# Altium PCB 1.8寸脱机4轴.PcbDoc
Units mm, origin at the board's own origin, x right, y up, seen from the top; angles counter-clockwise.
Board outline 222.2 x 126.2 mm, 2 copper layers (Top Layer, Bottom Layer); 53 components, 62 nets, 302 pads, 159 vias.
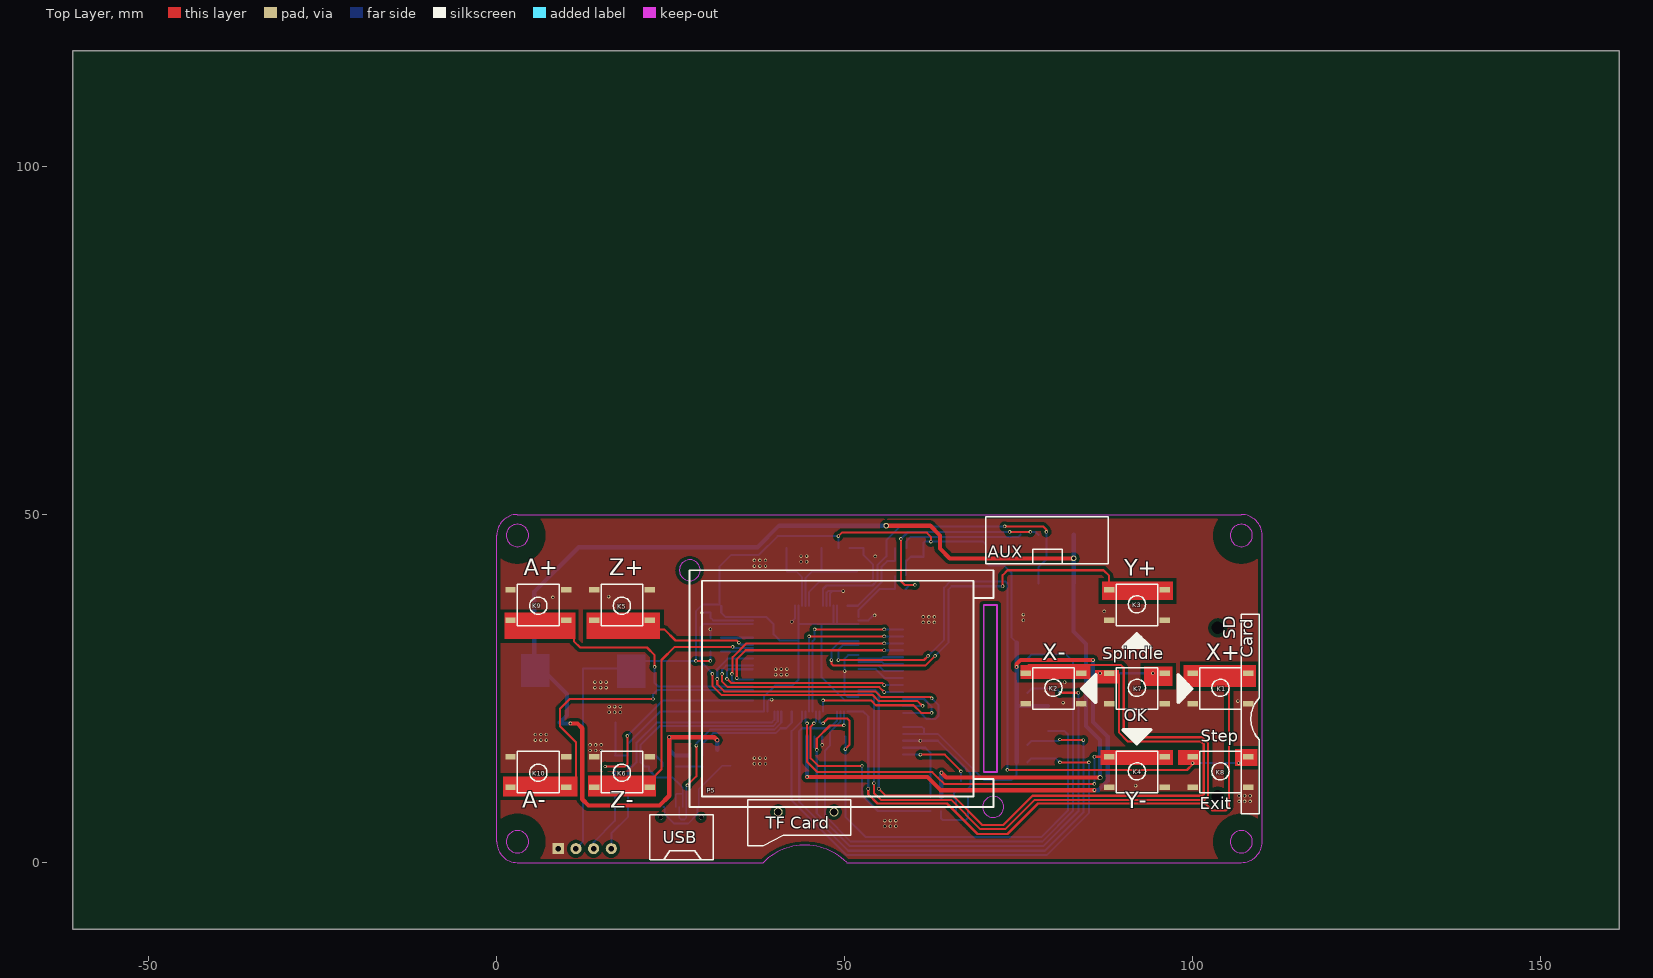
[diagram p0: Top Layer view]
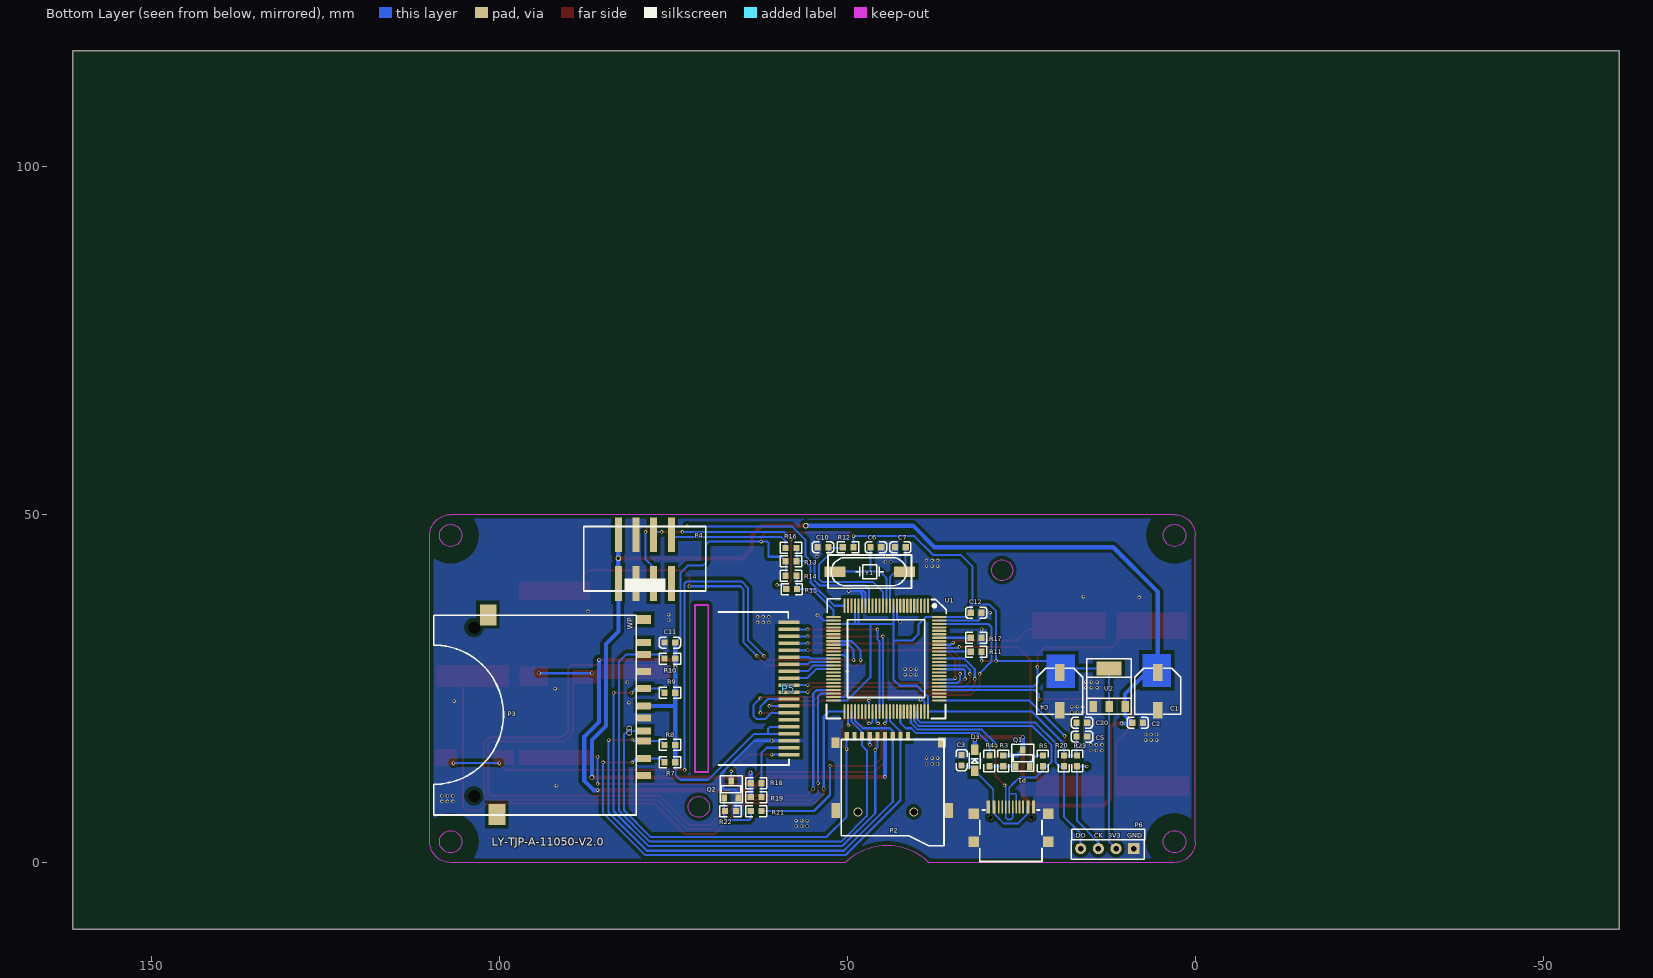
[diagram p1: Bottom Layer view, seen from below]

## Layer stack, top to bottom
Top Solder: solder mask 0.0102, Solder Resist, Dk 3.5
Top Layer: signal copper 0.0356
Dielectric1: dielectric 0.32, FR-4, Dk 4.8
Bottom Layer: signal copper 0.0356
Bottom Solder: solder mask 0.0102, Solder Resist, Dk 3.5

## Board outline
-60.9,-9.56 -60.9,116.64 161.3,116.64 161.3,-9.56 -60.9,-9.56

## Design rules (kind name [scope] priority, off if disabled: settings)
Clearance [All] p1: gap=0.178
ComponentClearance [All] p1 off: gap=0.254 collisioncheckmode=3 verticalgap=0.254 showdistances=FALSE
MinimumSolderMaskSliver [All] p1 off: minsoldermaskwidth=0.254
PolygonConnect [All] p1: connectstyle=Direct reliefconductorwidth=0.254 reliefentries=4 polygonreliefangle="90 Angle" airgapwidth=0.254
RoutingVias [All] p1: holewidth=0.3 width=0.5 viastyle="Through Hole" minholewidth=0.3 minwidth=0.3 maxholewidth=5 maxwidth=7
SilkToSilkClearance [All] p1 off: silktosilkclearance=0.254
SilkToSolderMaskClearance SilkscreenOverComponentPads [IsPad] p1 off: minsilkscreentomaskgap=0.254 clearancetoexposedcopper=TRUE
SolderMaskExpansion [All] p1: expansion=0.102
Width [All] p1: maxlimit=5 minlimit=0.1 preferedwidth=0.254
26 further rules are at their usual default settings.

## Components (designator, comment, footprint, x,y, rotation, side; value= is the part's Value field where it differs from the comment)
C1 "100uF/35V" 电解电容贴片6X6 5.4,24.6 r270 bottom
C2 "104" 0603C 8.3,20.1 r0 bottom
C3 "104" 0603C 33.6,14.7 r270 bottom
C4 "100uF/35V" 电解电容贴片6X6 19.5,24.6 r270 bottom
C5 "104" 0603C 16.3,18.1 r0 bottom
C6 "22pF" 0603C 45.9,45.3 r180 bottom
C7 "22pF" 0603C 42.4,45.3 r0 bottom
C10 "104" 0603C 53.5,45.3 r180 bottom
C11 "104" 0603C 75.5,31.6 r180 bottom
C12 "104" 0603C 31.5,35.9 r0 bottom
C20 "106" 0603C 16.3,20.1 r0 bottom
D3 "S4" SOD-123 31.7,14.7 r90 bottom
K1 "" 按键6X6贴片 104,25 r90 top locked
K2 "" 按键6X6贴片 80,25 r90 top locked
K3 "" 按键6X6贴片 92,37 r90 top locked
K4 "" 按键6X6贴片 92,13 r90 top locked
K5 "" 按键6X6贴片 18,37 r270 top locked
K6 "" 按键6X6贴片 18,13 r270 top locked
K7 "" 按键6X6贴片 92,25 r90 top locked
K8 "" 按键6X6贴片 104,13 r90 top locked
K9 "" 按键6x6贴片 6,37 r270 top
K10 "" 按键6x6贴片 6,13 r270 top
P1 "USB座TYPE-C-16P" USB-TYPE-C-16P-全贴片 26.5,5.3 r180 bottom
P2 "TF" TF卡自弹式 43.7,10.3 r0 bottom
P3 "11P" SD卡座自弹式 91.421,21.244 r90 bottom
P4 "8P" IDC8贴片 79.1,43.6 r180 bottom
P5 "LCD" 显示屏1.77寸 48,25 r90 top
P6 "" SIP4 8.86,2 r0 bottom
Q1 "SS8550" SOT-23 24.8,15 r180 bottom
Q2 "S8050" SOT-23 66.7,10.5 r180 bottom
R3 "10K" 0603R 27.6,14.6 r270 bottom
R4 "1K" 0603R 29.6,14.6 r90 bottom
R5 "1K" 0603R 21.9,14.6 r270 bottom
R7 "10K" 0603R 75.5,14.4 r0 bottom
R8 "10K" 0603R 75.5,16.9 r0 bottom
R9 "10K" 0603R 75.5,24.4 r0 bottom
R10 "10K" 0603R 75.5,29.3 r0 bottom
R11 "10K" 0603R 31.5,30.3 r0 bottom
R12 "10k" 0603R 49.9,45.3 r0 bottom
R13 "10K" 0603R 58.1,43.3 r0 bottom
R14 "10K" 0603R 58.1,41.2 r0 bottom
R15 "47" 0603R 58,39.3 r0 bottom
R16 "47" 0603R 58.1,45.2 r0 bottom
R17 "10k" 0603R 31.5,32.3 r0 bottom
R18 "47" 0603R 63.1,11.4 r0 bottom
R19 "47" 0603R 63.1,9.4 r0 bottom
R20 "10k" 0603R 18.9,14.6 r90 bottom
R21 "1K" 0603R 63.1,7.4 r180 bottom
R22 "10K" 0603R 66.8,7.4 r0 bottom
R23 "10k" 0603R 17,14.6 r90 bottom
U1 "STM32F103VCT6" LQFP100 44.4,29.3 r270 bottom
U2 "1117-3.3" SOT-223 12.4,25.1 r180 bottom
Y1 "8M" 晶振贴片 46.8,41.8 r0 bottom

## Footprints (in the part's own frame and the unit in brackets; to place one, negate y for a bottom-side part, rotate by r counter-clockwise, add the part's x,y. Pads: shape width x height; smd on the part's side, far side on the other; paste and mask are expansions set on the pad)
0603C [mil]
  rect 35x35 smd: 1(-30.5,0) 2(30.5,0)
  silkscreen extent -61,-31 60,31
0603R [mil]
  rect 35x35 smd: 1(-30.5,0) 2(30.5,0)
  silkscreen extent -61,-31 60,31
IDC8贴片 [mm]
  rect 1x5 smd: 1(-3.81,-3.5) 2(-3.81,3.5) 3(-1.27,-3.5) 4(-1.27,3.5) 5(1.27,-3.5) 6(1.27,3.5) 7(3.81,-3.5) 8(3.81,3.5)
  silkscreen extent -8.76,-4.7 8.76,4.7
LQFP100 [mm]
  oval 2.1x0.3 smd: 1(-7.6,6) 2(-7.6,5.5) 3(-7.6,5) 4(-7.6,4.5) 5(-7.6,4) 6(-7.6,3.5) 7(-7.6,3) 8(-7.6,2.5) 9(-7.6,2) 10(-7.6,1.5) 11(-7.6,1) 12(-7.6,0.5) 13(-7.6,0) 14(-7.6,-0.5) 15(-7.6,-1) 16(-7.6,-1.5) 17(-7.6,-2) 18(-7.6,-2.5) 19(-7.6,-3) 20(-7.6,-3.5) 21(-7.6,-4) 22(-7.6,-4.5) 23(-7.6,-5) 24(-7.6,-5.5) 25(-7.6,-6) 51(7.6,-6) 52(7.6,-5.5) 53(7.6,-5) 54(7.6,-4.5) 55(7.6,-4) 56(7.6,-3.5) 57(7.6,-3) 58(7.6,-2.5) 59(7.6,-2) 60(7.6,-1.5) 61(7.6,-1) 62(7.6,-0.5) 63(7.6,0) 64(7.6,0.5) 65(7.6,1) 66(7.6,1.5) 67(7.6,2) 68(7.6,2.5) 69(7.6,3) 70(7.6,3.5) 71(7.6,4) 72(7.6,4.5) 73(7.6,5) 74(7.6,5.5) 75(7.6,6)
  oval 0.3x2.1 smd: 26(-6,-7.6) 27(-5.5,-7.6) 28(-5,-7.6) 29(-4.5,-7.6) 30(-4,-7.6) 31(-3.5,-7.6) 32(-3,-7.6) 33(-2.5,-7.6) 34(-2,-7.6) 35(-1.5,-7.6) 36(-1,-7.6) 37(-0.5,-7.6) 38(0,-7.6) 39(0.5,-7.6) 40(1,-7.6) 41(1.5,-7.6) 42(2,-7.6) 43(2.5,-7.6) 44(3,-7.6) 45(3.5,-7.6) 46(4,-7.6) 47(4.5,-7.6) 48(5,-7.6) 49(5.5,-7.6) 50(6,-7.6) 76(6,7.6) 77(5.5,7.6) 78(5,7.6) 79(4.5,7.6) 80(4,7.6) 81(3.5,7.6) 82(3,7.6) 83(2.5,7.6) 84(2,7.6) 85(1.5,7.6) 86(1,7.6) 87(0.5,7.6) 88(0,7.6) 89(-0.5,7.6) 90(-1,7.6) 91(-1.5,7.6) 92(-2,7.6) 93(-2.5,7.6) 94(-3,7.6) 95(-3.5,7.6) 96(-4,7.6) 97(-4.5,7.6) 98(-5,7.6) 99(-5.5,7.6) 100(-6,7.6)
  silkscreen extent -8.6,-8.6 8.6,8.6
SD卡座自弹式 [mm]
  round 1.524 hole 1.8: 0(-11.684,12.221) 0(12.499,12.221)
  rect 1x2 smd: 1(-6.264,-12.221) 2(-3.764,-12.221) 3(-0.464,-12.221) 4(1.236,-12.221) 5(3.736,-12.221) 6(6.236,-12.221) 7(8.666,-12.221) 8(10.356,-12.221) 9(-8.764,-12.221) 10(-2.364,-12.221)
  rect 1.3x2 smd: 11(13.656,-12.221)
  rect 3x2.4 smd: 12(14.351,10.189) 13(-14.351,8.919)
  silkscreen extent -14.41,-11.08 14.29,18
SIP4 [mm] "Connector; Header; 4 Position"
  rect 1.6x1.6 hole 0.8: 1(0,0)
  round 1.6 hole 0.8: 2(2.54,0) 3(5.08,0) 4(7.62,0)
  silkscreen extent -1.52,-1.27 9,1.52
SOD-123 [mm]
  rect 1.5x1.1 smd: 1(-1.5,0) 2(1.5,0)
  silkscreen extent -1.2,-0.8 1.1,0.8
SOT-23 [mm]
  rect 0.8x1 smd: 1(-1,-1.2) 2(0,1.2) 3(1,-1.2)
  silkscreen extent -1.6,-1.9 1.6,2
SOT-223 [mm] "SOT-223/SC-73; 4 Leads; Body 6.7 x 7.3 mm, inc. leads (LxW max)"
  rect 1.1x1.6 smd: 1(-2.3,-2.7) 2(0,-2.7) 3(2.3,-2.7)
  rect 3.6x2 smd: 4(0,2.8)
  silkscreen extent -3.2,-3.8 3.2,4.2
TF卡自弹式 [mil]
  round 50 hole 39.37: 0(-127.73,119.44) 0(188.27,119.44)
  rect 23x47.24 smd: 1(-95.23,-308.56) 2(-51.86,-308.56) 3(-8.48,-308.56) 4(34.89,-308.56) 5(78.27,-308.56) 6(121.64,-308.56) 7(165.02,-308.56) 8(208.39,-308.56) 9(251.77,-308.56)
  rect 46x60 smd: 10(314.27,-272.06)
  rect 46x85 smd: 11(313.77,110.44) 12(-325.23,109.94)
  rect 45x56 smd: 13(-286.23,-274.56)
  silkscreen extent -298,-291 283,310
USB-TYPE-C-16P-全贴片 [mm]
  rect 1.5x1.5 smd: 1(-5.33,1.713) 2(5.33,1.713) 3(-5.33,-2.287) 4(5.33,-2.287)
  rect 0.26x1.9 smd: A1(-3.35,2.693) A4(-2.55,2.693) A5(-1.25,2.693) A6(-0.25,2.693) A7(0.25,2.693) A8(1.25,2.693) A9(2.55,2.693) A12(3.35,2.693) B1(3.15,2.693) B4(2.35,2.693) B5(1.75,2.693) B6(0.75,2.693) B7(-0.75,2.693) B8(-1.75,2.693) B9(-2.35,2.693) B12(-3.15,2.693)
  round 0.65 hole 0.65 unplated: ""(-2.89,1.213) ""(2.89,1.213)
  silkscreen extent -4.47,-5.14 4.47,2.24
按键6X6贴片 [mm]
  rect 0.8x1.5 smd: 1(2.2,4) 2(-2.2,4) 3(2.2,-4) 4(-2.2,-4)
  silkscreen extent -3,-3 3,3
按键6x6贴片 [mm]
  rect 0.8x1.5 smd: 1(2.2,4) 2(-2.2,4) 3(2.2,-4) 4(-2.2,-4)
  silkscreen extent -3,-3 3,3
显示屏1.77寸 [mm]
  rect 0.5x3 smd far side: 1(-9.5,-10.4) 2(-8.5,-10.4) 3(-7.5,-10.4) 4(-6.5,-10.4) 5(-5.5,-10.4) 6(-4.5,-10.4) 7(-3.5,-10.4) 8(-2.5,-10.4) 9(-1.5,-10.4) 10(-0.5,-10.4) 11(0.5,-10.4) 12(1.5,-10.4) 13(2.5,-10.4) 14(3.5,-10.4) 15(4.5,-10.4) 16(5.5,-10.4) 17(6.5,-10.4) 18(7.5,-10.4) 19(8.5,-10.4) 20(9.5,-10.4)
  Keep-Out Layer lines w0.256: -12,-22 12,-22 12,-23.9 -12,-23.9 -12,-22
  silkscreen extent -17,-23.4 17,20.3
晶振贴片 [mm]
  rect 3x1.5 smd: 1(-5,0) 2(5,0)
  silkscreen extent -6,-2.4 6,2.4
电解电容贴片6X6 [mm]
  rect 2.4x1.4 smd: 1(-2.7,0) 2(2.7,0)
  silkscreen extent -3.3,-3.3 3.3,3.3

## Part data
C1 C4: library part ELECTRO1
C2 C3 C5 C6 C7 C10 C20: library part "Cap Semi", "Capacitor (Semiconductor SIM Model)"
C11 C12: library part CAP
D3: library part 1N4148
K1 K2 K3 K4 K5 K6 K7 K8 K9 K10: library part 按键
P2: library part 9P
P5: library part 20P
P6: library part 4P
Q1: library part PNP
Q2: library part NPN
R3 R4 R5 R7 R8 R9 R10 R11 R12 R13 R14 R15 R16 R17 R18 R19 R20 R21 R22 R23: library part RES, "Resistor"
U1: library part STM32F103VBT6, "STM32 ARM-based 32-bit MCU with 64 Kbytes Flash, 100-pin LQFP, Industrial Temperature"
U2: library part LM1117
Y1: library part XTAL, "Crystal Oscillator"

## Free pads (board coordinates)
  round 0.8 hole 0.5: 0(82.9,43.7) 1(55.972,48.4)

## Via types
v1: diameter 0.5, hole 0.3, Top Layer to Bottom Layer, 158 vias
v2: diameter 0.7, hole 0.5, Top Layer to Bottom Layer, 1 vias

## Nets (pads, with @x,y where several pads share a name; then routed paths per layer and width w, separated by ;. In a path a pad name is that pad's centre, name@x,y a point inside that pad or via, vN(x,y) a via of type N, cw(c..) or ccw(c..) an arc to the next point about the centre after c; other vN are vias at no path point)
3V3: C4.1 C5.2 C11.2 C12.2 C20.2 P2.4 P3.4 P5.4 P5.5 P6.2 R7.1 R8.1 R9.1 R10.1 R11.1 R12.1 R13.2 R14.2 R20.2 R23.2 U1.11 U1.21 U1.22 U1.28 U1.50 U1.75 U1.100 U2.2 U2.4 | length 351.6
  Top Layer w0.3: v1(28.625,28.975) v1(30.725,28.975) ; v1(49.1,46.9) 49.6,47.4 61.8,47.4 62.4,46.8 v1(62.4,46.1)
  Top Layer w0.6: v1(44.6,12.3) 46.1,12.3 ; 45.6,12.3 46.1,12.3 ; v1(74.7,28.1) 74.7,28.5 75.3,29.1 v1(85.7,29.1) ; v1(85.9,10.4) 63.8,10.4 61.9,12.3 46.1,12.3
  Bottom Layer w0.3: P6.2 12.4,3 U2.2 U2.4 18.9,27.9 C4.1 21.175,28.975 v1(28.625,28.975) 28.625,36.125 29.6,37.1 32,37.1 ; C20.2 C5.2 17.075,15.449 R23.2 R20.2 18.9,17.1 23.5,21.7 32,21.7 ; v1(30.725,28.975) R11.1 ; 31.5,21.7 32,21.7 ; U1.11 43.4,31.9 ; 43.5,34.3 46.7,34.3 ; U1.21 48.4,34.3 ; U1.22 48.9,34.3 ; R12.1@49.125,45.2 R12.1 49.125,46.875 v1(49.1,46.9) 40.4,46.9 37.7,44.2 33.7,44.2 32,42.5 32,37.1 ; U1.50 50,23.3 46.7,26.6 46.7,34.3 ; U1.28 48.9,34.3 ; P5.4 61.4,18.5 ; P5.5 61.1,19.5 61.4,19.2 61.4,18.5 ; R14.2@58.8,41.3 R13.2@58.8,43.4 ; R13.2 59.51,43.935 61.317,43.935 61.317,45.917 61.5,46.1 v1(62.4,46.1) 69.9,46.1 70.3,45.7 70.3,43.165 70.8,42.665 72.935,42.665 74,41.6 74,32.325 C11.2 ; R7.1 74.725,12.625 74,11.9 70,11.9 63.4,18.5 61.4,18.5 ; 74.725,21.8 74.805,21.88 ; 32,21.7 U1.75 38.4,23.8 40,25.4 42.5,25.4 43.4,26.3 43.4,31.9 ; 32,37.1 32.275,36.825 C12.2 32.875,35.3 U1.100 38.7,35.3 39.8,34.2 39.8,32.8 40.7,31.9 43.4,31.9 ; 46.7,34.3 48.4,34.3 ; 48.4,34.3 48.9,34.3
  Bottom Layer w0.6: P6.2 P6.2@11.8,2.4 ; P2.4 44.586,12.314 v1(44.6,12.3) ; R7.1 R8.1 74.725,21.8 74.725,22.5 ; C11.2 R10.1 R9.1 74.725,22.5 ; P3.4 74.745,22.48 74.725,22.5 ; v1(85.7,29.1) 85.7,20.2 87.8,18.1 87.8,11.7 86.5,10.4 v1(85.9,10.4)
BAT: U1.6
BOOT0: R17.2 U1.94 | length 4.5
  Bottom Layer w0.3: R17.2 U1.94
COM_RST: P4.5 U1.18 | length 49.3
  Top Layer w0.3: v1(73,48.3) 78.5,48.3 79,47.8 v1(79,47.5)
  Bottom Layer w0.3: U1.18 46.9,39.3 47.4,39.8 54,39.8 54.7,40.5 54.7,42.7 56,44 56,46.3 58,48.3 v1(73,48.3) ; P4.5 77.83,42.43 79,43.6 v1(79,47.5)
FLASH_CS: U1.29
FLASH_MISO: U1.31
FLASH_MOSI: U1.32
FLASH_SCK: U1.30
GND: C1.2 C2.1 C3.1 C4.2 C5.1 C6.2 C7.2 C10.1 C11.1 C12.1 C20.1 K1.2 K1.4 K2.2 K2.4 K3.2 K3.4 K4.2 K4.4 K5.2 K5.4 K6.2 K6.4 K7.2 K7.4 K8.2 K8.4 K9.2 K9.4 K10.2 K10.4 P1.1 P1.2 P1.3 P1.4 P1.A1 P1.A12 P1.B1 P1.B12 P2.6 P2.10 P2.11 P2.12 P2.13 P3.3 P3.6 P4.3 P4.4 P5.3 P5.20 P6.1 Q2.3 R17.1 R22.1 U1.10 U1.19 U1.20 U1.27 U1.37 U1.49 U1.74 U1.99 U2.1 | length 52.9
  Bottom Layer w0.3: v1(29.5,35.9) C12.1 30.725,35.175 31.1,34.8 U1.99 ; R17.1 v1(30.725,33.525) ; U1.74 38.9,23.1 39.2,23.4 v1(39.5,23.4) ; v1(42.4,34.6) 42.9,35.1 U1.10 ; v1(46.79,16.91) P2.6 ; U1.19 47.4,38.8 47.6,39 48.2,39 ; U1.20 47.9,38.7 48.2,39 ; v1(49.8,39) 48.2,39 ; U1.49 50.4,23.8 50,24.2 50,29.3 50.5,29.8 U1.37 ; U1.27 53.4,34.8 54.1,35.5 v1(54.3,35.5) ; P5.3 v1(60.9,17.5) 63.4,17.5 68.1,12.8 68.1,11 67.6,10.5 66.2,10.5 65.7,10 Q2.3 66.025,8.975 R22.1
  other v1: 55.767,5.22 56.567,5.22 57.367,5.22 55.767,6.02 56.567,6.02 57.367,6.02 106.666,8.8 107.466,8.8 108.266,8.8 106.666,9.6 107.466,9.6 108.266,9.6 91.8,11.06 37.034,14.2 37.834,14.2 38.634,14.2 37.034,15 37.834,15 38.634,15 13.434,16.1 14.234,16.1 15.034,16.1 13.434,16.9 14.234,16.9 15.034,16.9 5.566,17.6 6.366,17.6 7.166,17.6 5.566,18.4 6.366,18.4 7.166,18.4 16.166,21.6 16.966,21.6 17.766,21.6 16.166,22.4 16.966,22.4 17.766,22.4 81.4,22.98 106.5,23.2 92,25 14.134,25.14 14.934,25.14 15.734,25.14 81.6,25.9 14.134,25.94 14.934,25.94 15.734,25.94 40.1,27 40.9,27 41.7,27 50,27.5 40.1,27.8 40.9,27.8 41.7,27.8 61.3,34.5 62.1,34.5 62.9,34.5 75.7,34.82 61.3,35.3 62.1,35.3 62.9,35.3 75.7,35.62 87.3,36.1 8.1,38.1 16.1,38.2 37.034,42.6 37.834,42.6 38.634,42.6 43.734,43.22 44.534,43.22 37.034,43.4 37.834,43.4 38.634,43.4 54.4,44 43.734,44.02 44.534,44.02
KEY_A+: K9.1 K9.3 U1.80 | length 31.7
  Top Layer w0.3: 11.1,32.8 11.1,31.8 12,30.9 21.6,30.9 22.7,29.8 v1(22.7,28.1)
  Bottom Layer w0.3: v1(22.7,28.1) 22.7,25.8 23.2,25.3 U1.80
KEY_A-: K10.1 K10.3 U1.79 | length 40.9
  Top Layer w0.3: 11.4,11.4 11.4,17.3 9.1,19.6 9.1,22.1 10.5,23.5 v1(22.5,23.5)
  Bottom Layer w0.3: v1(22.5,23.5) 22.5,24.2 23.1,24.8 U1.79
KEY_ENTER: K7.1 K7.3 U1.47 | length 110.8
  Top Layer w0.3: v1(54.9,10.6) 55.9,9.6 63.8,9.6 ; 62,9.6 63.8,9.6 ; v1(86.7,27.2) K7.1 89.2,27.2 89.4,27 89.4,18.7 90.7,17.4 101.2,17.4 101.6,17 101.6,9.8 101.4,9.6 77,9.6 72.8,5.4 69.8,5.4 65.6,9.6 63.8,9.6 ; v1(94.3,27.2) K7.3
  Bottom Layer w0.3: U1.47 53.4,24.8 ; 54,24.8 53.4,24.8 ; v1(54.9,10.6) 54.9,15.2 ; 54.9,14.8 54.9,15.2 ; v1(86.7,27.2) v1(94.3,27.2) ; 53.4,24.8 54.4,24.8 54.9,24.3 54.9,15.2
KEY_EXIT: K8.1 K8.3 U1.34 | length 101.2
  Top Layer w0.3: v1(49.1,29.1) 61.4,29.1 v1(62,29.7) ; v1(73.4,13.3) 99.2,13.3 100,14.1 v1(100,14.3) K8.1 ; v1(106.6,14.3) 107.1,14.3 K8.3
  Bottom Layer w0.3: v1@49.1,29.3 49.1,30.6 49.8,31.3 U1.34 ; v1(62,29.7) 64.3,32 64.3,39.5 65.2,40.4 73.1,40.4 73.4,40.1 v1(73.4,13.3) ; v1(100,14.3) v1(106.6,14.3)
KEY_X+: K1.1 K1.3 U1.51 | length 100.8
  Top Layer w0.3: v1(53.4,10.6) 53.4,9.8 54.717,8.483 63.6,8.483 ; 61.317,8.483 63.6,8.483 ; K1.1@100,27.1 104.6,27.1 ; K1.3 107.9,27.1 104.6,27.1 ; 63.6,8.483 64.717,8.483 69.1,4.1 73.4,4.1 77.783,8.483 101.817,8.483 102.8,7.5 104.8,7.5 105.2,7.9 105.2,26.5 104.6,27.1
  Bottom Layer w0.3: U1.51 52.7,21.7 53.4,21 v1(53.4,10.6)
KEY_X-: K2.1 K2.3 U1.48 | length 121.1
  Top Layer w0.3: v1(54.2,11.4) 54.2,10 55.2,9 65.3,9 69.5,4.8 73.1,4.8 77.3,9 101.7,9 102.2,9.5 102.2,17.2 101.4,18 91,18 90.1,18.9 90.1,28 89.7,28.4 76.5,28.4 76,27.9 K2.1 K2.3
  Bottom Layer w0.3: U1.48 53.8,24.3 54.2,23.9 v1(54.2,11.4)
KEY_Y+: K3.1 K3.3 U1.33 | length 67.8
  Top Layer w0.3: v1(48.1,29.1) 48.1,28.6 48.4,28.3 61.6,28.3 v1(63,29.7) ; v1(72.7,39.7) 72.7,41.3 73.4,42 87.2,42 88,41.2 K3.1 K3.3
  Bottom Layer w0.3: v1(48.1,29.1) 48.1,30.5 49.4,31.8 U1.33 ; v1(63,29.7) 64.95,31.65 64.95,39.25 65.4,39.7 v1(72.7,39.7)
KEY_Y-: K4.1 K4.3 U1.63 | length 63.9
  Top Layer w0.3: v1(44.6,20) 44.6,14.5 46.1,13 62.6,13 63.4,12.2 64.3,11.3 v1(85.9,11.3) ; v1(85.9,15.2) K4.1 K4.3
  Bottom Layer w0.3: U1.63 44.4,20.2 v1(44.6,20) ; v1(85.9,11.3) v1(85.9,15.2)
KEY_Z+: K5.1 K5.3 U1.92 | length 16
  Top Layer w0.3: 21.7,33.5 24.1,33.5 25.7,31.9 34.5,31.9 v1(34.8,31.6)
  Bottom Layer w0.3: v1(34.8,31.6) 35.1,31.3 U1.92
KEY_Z-: K6.1 K6.3 U1.91 | length 31.5
  Top Layer w0.3: 22.2,11.9 23.7,13.4 23.7,29.1 25.6,31 v1(33.9,31)
  Bottom Layer w0.3: 34.1,30.8 U1.91
LCD_BLK: R21.2 U1.60 | length 29.8
  Top Layer w0.3: v1(45.6,20) 45.122,19.522 45.122,14.978 46.2,13.9 v1(52.5,13.9)
  Bottom Layer w0.3: v1(45.6,20) 45.9,20.3 U1.60 ; v1(52.5,13.9) 52.5,9.7 54.8,7.4 R21.2
LCD_CS: P5.7 U1.88 | length 48.1
  Top Layer w0.3: v1(31.7,26.4) 31.7,25.6 32.7,24.6 54.4,24.6 55.2,23.8 62.3,23.8 v1(62.5,23.6)
  Bottom Layer w0.3: v1(31.7,26.4) 31.7,27.8 33.2,29.3 U1.88 ; P5.7 60.9,21.5 61.8,20.6 63,20.6 63.5,21.1 63.5,22.6 v1(62.5,23.6)
LCD_DB0: P5.19 U1.61 | length 24.6
  Top Layer w0.3: v1(45.7,33.5) v1(55.7,33.5)
  Bottom Layer w0.3: U1.61 45.4,31.8 45.7,32.1 v1(45.7,33.5) ; v1(55.7,33.5) P5.19
LCD_DB1: P5.18 U1.62 | length 24.3
  Top Layer w0.3: v1@44.9,32.4 45,32.5 v1(55.7,32.5)
  Bottom Layer w0.3: U1.62 v1(44.9,32.5) ; v1(55.7,32.5) P5.18
LCD_DB2: P5.17 U1.81 | length 31.8
  Top Layer w0.3: v1(33.8,27.1) 33.922,27.222 33.922,29.522 35.9,31.5 v1(55.7,31.5)
  Bottom Layer w0.3: v1(33.8,27.1) 33.8,26.2 34.2,25.8 U1.81 ; v1(55.7,31.5) P5.17
LCD_DB3: P5.16 U1.82 | length 29.5
  Top Layer w0.3: v1(34.5,26.5) 34.5,29.2 35.8,30.5 v1(55.7,30.5)
  Bottom Layer w0.3: v1(34.5,26.5) 34.7,26.3 U1.82 ; v1(55.7,30.5) P5.16
LCD_DB4: P5.15 U1.38 | length 6.5
  Bottom Layer w0.3: U1.38 55.3,29.3 55.5,29.5 P5.15
LCD_DB5: P5.14 U1.39 | length 6.5
  Bottom Layer w0.3: U1.39 55.4,28.8 55.7,28.5 P5.14
LCD_DB6: P5.13 U1.40 | length 6.7
  Bottom Layer w0.3: U1.40 54.9,28.3 55.7,27.5 P5.13
LCD_DB7: P5.12 U1.41 | length 6.9
  Bottom Layer w0.3: U1.41 54.5,27.8 55.8,26.5 P5.12
LCD_RD: P5.11 U1.85 | length 30.7
  Top Layer w0.3: v1(33.1,26.4) 33.7,25.8 55.4,25.8 v1(55.7,25.5)
  Bottom Layer w0.3: v1(33.1,26.4) 33.1,27.6 33.278,27.778 36.778,27.778 U1.85 ; v1(55.7,25.5) P5.11
LCD_RS: P5.9 U1.58 | length 23.4
  Top Layer w0.3: v1(46.9,23.3) 53.8,23.3 54.5,22.6 59.9,22.6 61,21.5 v1(62.5,21.5)
  Bottom Layer w0.3: U1.58 v1(46.9,23.3) ; P5.9 61.4,23.5 62.5,22.4 v1(62.5,21.5)
LCD_RST: P5.8 U1.98 | length 51
  Top Layer w0.3: v1(31,27.1) 31,25.4 32.3,24.1 54,24.1 54.9,23.2 60.5,23.2 v1(61.2,22.5)
  Bottom Layer w0.3: v1(31,27.1) 31,27.2 29.3,28.9 29.3,33.8 29.8,34.3 U1.98 ; P5.8 v1(61.2,22.5)
LCD_WR: P5.10 U1.86 | length 33
  Top Layer w0.3: v1(32.4,27.1) 32.4,26 33.2,25.2 55,25.2 v1(55.7,24.5)
  Bottom Layer w0.3: v1(32.4,27.1) 32.4,27.7 33,28.3 U1.86 ; v1(55.7,24.5) P5.10
NetP4_6: P4.6 R15.2 | length 32.9
  Top Layer w0.3: v1(58.1,46.5) 58.1,40.4 58.6,39.9 v1(60.1,39.9) ; v1(73.7,47.5) v1(76.7,47.5)
  Bottom Layer w0.3: v1(58.1,46.5) 59.1,47.5 62.5,47.5 ; R15.2 59.375,39.9 v1(60.1,39.9) ; 59.8,47.5 62.5,47.5 ; v1(73.7,47.5) 62.5,47.5 ; v1(76.7,47.5) 77.43,47.5 P4.6
NetP4_8: P4.8 R16.2 | length 18
  Bottom Layer w0.3: R16.2 58.875,46.175 59.5,46.8 74.4,46.8 ; 74.6,46.8 74.4,46.8 ; P4.8 74.99,46.8 74.4,46.8
NetP5_1: P5.1 Q2.2 | length 10.8
  Top Layer w0.3: v1(60.9,15.5) 64.4,15.5 66.7,13.2 v1(66.7,13.1)
  Bottom Layer w0.3: P5.1 v1(60.9,15.5) ; Q2.2 v1(66.7,13.1)
NetP5_2: P5.2 R18.1 R19.1 | length 10.7
  Bottom Layer w0.3: P5.2 61.6,16.5 62.325,15.775 R18.1 ; R19.1 R18.1 ; R18.1 62.3,11.4 62.3,11.425 R18.1
NetQ1_1: Q1.1 R3.2 R4.1 | length 3.8
  Bottom Layer w0.3: Q1.1 29.575,13.8 R4.1
NetQ1_3: Q1.3 R5.1 | length 2.9
  Bottom Layer w0.3: R5.1 22.825,15.375 23.8,14.4 Q1.3 Q1.3@23.775,13.825
NetQ2_1: Q2.1 R21.1 R22.2 | length 8
  Bottom Layer w0.3: R21.1 63.875,6.325 64.1,6.1 67.4,6.1 67.7,6.4 Q2.1
NetR11_2: R11.2 U1.90 | length 4.5
  Bottom Layer w0.3: R11.2 U1.90
NRST: C10.2 R12.2 U1.14 | length 19
  Bottom Layer w0.3: U1.14 44.9,38.9 46.3,40.3 53.6,40.3 54.1,40.8 54.1,42.8 52.725,44.175 52.725,45.2 R12.2@50.675,45.2
RXD: R14.1 R15.1 U1.26 | length 9.3
  Bottom Layer w0.3: U1.26 52,36.224 55.076,39.3 R15.1 R14.1@57.225,41.2
SD_CD: P2.9 P3.10 U1.59 | length 71
  Top Layer w0.3: v1(46.9,20) 47.6,20.7 50.4,20.7 50.7,20.4 50.7,16.9 v1(50.1,16.3)
  Bottom Layer w0.3: U1.59 46.4,20.2 46.6,20 v1(46.9,20) ; P2.9 50.1,18.132 v1(50.1,16.3) 50.1,6.6 53,3.7 58.2,3.7 70.9,3.7 78.3,3.7 82.1,7.5 82.1,18.4 81.62,18.88 P3.10
SD_CK: P2.5 P3.5 R9.2 U1.52 | length 85.9
  Top Layer w0.3: v1(46,16.2) 46,17.8 47.9,19.7 v1(49.9,19.7) ; v1(81,24.4) v1(83.6,24.4)
  Bottom Layer w0.3: P2.5 45.688,16.512 v1(46,16.2) 46,7.1 50.7,2.4 54.5,2.4 78.6,2.4 83.6,7.4 v1(83.6,24.4) ; v1(49.9,19.7) U1.52 ; R9.2 76.855,24.98 P3.5 80.42,24.98 v1(81,24.4)
SD_CMD: P2.3 P3.2 R8.2 U1.54 | length 82.2
  Top Layer w0.3: v1@81,17.6 v1(84.3,17.6)
  Bottom Layer w0.3: U1.54 48.9,20.4 47.8,19.3 43.885,19.3 43.485,18.9 P2.3 43.485,8.715 50.5,1.7 55,1.7 78.8,1.7 84.3,7.2 v1(84.3,17.6) ; R8.2@76.295,16.88 R8.2 76.855,17.48 P3.2 80.72,17.48 v1(80.92,17.68)
SD_D0: P2.7 P3.7 R10.2 U1.53 | length 83.6
  Bottom Layer w0.3: U1.53 49.4,20.224 47.892,18.716 P2.7 47.892,16.792 47.2,16.1 47.2,6.7 50.9,3 55.6,3 78.4,3 82.8,7.4 82.8,28.9 81.79,29.91 P3.7 76.885,29.91 R10.2
SD_D3: P2.2 P3.1 R7.2 U1.64 | length 78.5
  Top Layer w0.3: v1(80.92,14.38) 85.08,14.38 v1(85.1,14.4)
  Bottom Layer w0.3: U1.64 43.9,20.4 42.383,18.883 P2.2 42.383,8.917 50.2,1.1 53.7,1.1 79.1,1.1 85.1,7.1 v1(85.1,14.4) ; R7.2 76.855,14.98 P3.1 80.32,14.98 v1(80.92,14.38)
SWCLK: P6.3 R23.1 U1.76 | length 42
  Top Layer w0.3: v1(15.6,13.8) 18.4,13.8 18.8,14.2 v1(18.8,18.2)
  Bottom Layer w0.3: P6.3 13.94,2.94 17,6 R23.1 15.625,13.825 v1(15.6,13.8) ; v1(18.8,18.2) 23.9,23.3 U1.76
SWDIO: P6.4 R20.1 U1.72 | length 39.3
  Bottom Layer w0.3: P6.4 16.48,4.18 18.9,6.6 R20.1 ; R20.1@19,13.825 19.525,13.825 20.1,14.4 20.1,17.2 23,20.1 39.5,20.1 39.9,20.5 U1.72
TXD: R13.1 R16.1 U1.25 | length 12.7
  Bottom Layer w0.3: U1.25 51.9,36.9 55.3,40.3 55.3,42.5 56.1,43.3 57.251,43.3 R16.1@57.251,45.2
UART_RX: U1.69
UART_TX: U1.68
USB+: P1.A6 P1.B6 R5.2 U1.71 | length 39.1
  Bottom Layer w0.254: P1.B6 25.75,9.75 25.9,9.9 26.75,9.9 ; 26.202,11.298 26.75,10.75 26.75,9.9 ; P1.A6 26.75,9.9
  Bottom Layer w0.3: 26.617,10.883 26.202,11.298 25.3,12.2 23,12.2 21.9,13.3 R5.2 21.275,13.825 20.7,14.4 20.7,16.9 23.4,19.6 39.724,19.6 40.4,20.276 U1.71
USB-: P1.A7 P1.B7 U1.70 | length 28.8
  Top Layer w0.3: v1(27.4,11.1) 28.7,12.4 v1(28.7,16.8)
  Bottom Layer w0.254: P1.A7 26.25,6.45 26.5,6.2 27,6.2 27.25,6.45 P1.B7 27.25,10.95 v1(27.4,11.1)
  Bottom Layer w0.3: v1(27.4,11.1) v1@27.417,11.083 ; 28.7,17.1 30.7,19.1 39.9,19.1 40.9,20.1 U1.70
USB_M: R4.2 U1.67 | length 17.4
  Bottom Layer w0.3: R4.2 29.6,17.1 31.1,18.6 40.1,18.6 40.8,19.3 41.6,19.3 42.4,20.1 U1.67
VCC: C1.1 C2.2 D3.2 P4.1 P4.2 pad.0 pad.1 Q1.2 R3.1 R18.2 R19.2 U2.3 | length 220.4
  Top Layer w0.6: v1(10.6,20) 11.6,20 12.3,19.3 12.3,9.1 13.2,8.2 23.4,8.2 24.8,9.6 v1(24.8,18) 31.272,18 v1(31.7,17.572) ; pad.1 62.3,48.4 63.7,47 63.7,45.1 65.1,43.7 pad.0 ; v1(63.9,12.9) 64.6,12.2 v2@86.5,12.2
  Bottom Layer w0.6: v1(10.6,20) 9.175,20 C2.2 10.1,21.125 U2.3 10.1,24.2 7,27.3 C1.1 5.4,38.9 11.8,45.3 37.5,45.3 40.6,48.4 pad.1 ; v1(24.8,18) Q1.2 25.625,15.375 R3.1 ; D3.2 v1(31.7,17.572) ; R19.2 R18.2 63.875,12.875 v1(63.9,12.9) ; P4.1@82.88,42 82.88,36.6 82.88,33.22 84.7,31.4 84.7,19.6 86.7,17.6 v2(86.7,12.2) ; P4.1 P4.2
VUSB: C3.2 D3.1 P1.A4 P1.A9 P1.B4 P1.B9 | length 16.8
  Bottom Layer w0.254: P1.A9 P1.B4 24.15,6.95 25.5,5.6 27.5,5.6 28.85,6.95 P1.B9 P1.A4 29.05,10.55 D3.1 32.425,13.925 C3.2
XTAL1: C7.1 U1.12 Y1.1 | length 10
  Bottom Layer w0.3: C7.1@41.625,45.2 41.625,41.975 Y1.1 43.1,41.8 43.9,41 U1.12
XTAL2: C6.1 U1.13 Y1.2 | length 15.2
  Bottom Layer w0.3: U1.13 44.4,40.9 45.3,41.8 46.6,41.8 ; C6.1@46.675,45.2 46.675,41.875 46.6,41.8 ; Y1.2 46.6,41.8
XTAL3: U1.8
XTAL4: U1.9
pads on no net: P1. P1.A5 P1.A8 P1.B5 P1.B8 P2.0 P2.1 P2.8 P3.0 P3.8 P3.9 P3.11 P3.12 P3.13 P4.7 P5.6 U1.1 U1.2 U1.3 U1.4 U1.5 U1.7 U1.15 U1.16 U1.17 U1.23 U1.24 U1.35 U1.36 U1.42 U1.43 U1.44 U1.45 U1.46 U1.55 U1.56 U1.57 U1.65 U1.66 U1.73 U1.77 U1.78 U1.83 U1.84 U1.87 U1.89 U1.93 U1.95 U1.96 U1.97

## Polygon pours and split planes (outlines as drawn)
GND on Bottom Layer "Keep-Out Layer-No Net" (hatched 90Degree grid 0.05 track 0.1, remove dead copper, pour order 1000): -5.7,55.9 -5.7,-4.1 116,-4.1 116,54.8 -5.5,54.8
GND on Top Layer "Keep-Out Layer-No Net" (hatched 90Degree grid 0.05 track 0.1, remove dead copper, pour order 1001): -5.1,55.1 115.2,55.1 115.2,-2.7 -4.8,-2.7 -4.8,54.9

## Keep-outs
Keep-Out Layer:
  circle w0.127: c3,47 r1.6
  circle w0.127: c3,3 r1.6
  circle w0.127: c107,3 r1.6
  circle w0.127: c107,47 r1.6
  circle w0.127: c27.75,42 r1.5
  circle w0.127: c71.35,8 r1.5
  lines w0.127: 50.29,0 107,0 ccw(c107,3) 110,3 110,47 ccw(c107,47) 107,50 3,50 ccw(c3,47) 0,47 0,3 ccw(c3,3) 3,0 38.3,0 cw(c44.31,-6.01) 50.29,0.031

## Other copper
Top Layer:
  rectangle net KEY_A+: 1.1,32.1 11.3,35.9
  rectangle net KEY_A-: 0.9,9.5 11.6,12.4
  rectangle net KEY_Y+: 87,37.7 97.2,40.4
  rectangle net KEY_X+: 98.7,25.2 109.1,28.4
  rectangle net KEY_ENTER: 93,25.4 97.1,28.2
  rectangle net KEY_ENTER: 86,25.7 89.4,27.7
  rectangle net KEY_EXIT: 106.1,13.9 109.3,16.3
  rectangle net KEY_EXIT: 97.9,14 100.9,16.2
  rectangle net KEY_Y-: 86.8,14 97.2,16.2
  rectangle net KEY_X-: 75.3,26.4 85.3,28.4
  rectangle net KEY_Z-: 13.1,9.5 22.9,12.5
  rectangle net KEY_Z+: 12.9,32.1 23.5,35.9
Bottom Layer:
  rectangle net 3V3: 17.3,25.1 21.4,29.9
  rectangle net VCC: 3.5,25.2 7.6,30

## Silkscreen, mask and mechanical layers (free items; w line width, h text height)
Top Overlay:
  lines w0.2: 22,0.4 22,6.9 31.1,6.9 31.1,0.4 22.1,0.4 ; 24,0.4 24.9,1.7 28.5,1.7 29.4,0.4 ; 77,42.9 77,45 81.3,45 81.3,43.1 81.3,42.9 ; 36.1,2.4 36.1,9 50.9,9 50.9,3.9 41.2,3.9 38.3,2.4 36.1,2.4 ; 70.3,42.9 70.3,49.7 87.9,49.7 87.9,42.9 70.3,42.9 ; 107,7 107,35.7 109.6,35.7 109.6,23.644 ccw(c112.6,20.644) 109.6,17.644 109.6,7 107,7
  lines w0.5: 84.631,24.469 84.631,25.531 ; 85.131,23.969 85.131,26.031 ; 90.969,18.131 93.031,18.131 ; 90.969,31.869 93.031,31.869 ; 91.469,17.631 92.531,17.631 ; 91.469,32.369 92.531,32.369 ; 98.869,23.969 98.869,26.031 ; 99.369,24.469 99.369,25.531 ; 84.1,25 86.1,23 86.1,27 84.1,25 ; 90,19.1 94,19.1 92,17.1 90,19.1 ; 90,30.9 94,30.9 92,32.9 90,30.9 ; 97.9,23 97.9,27 99.9,25 97.9,23
  lines w0.55: 85.593,23.561 85.593,26.452 ; 90.548,18.593 93.439,18.593 ; 90.561,31.407 93.452,31.407 ; 98.407,23.548 98.407,26.439
  text "AUX" at 70.6,43.2 h3
  text "A+" at 3.9,40.5 h4
  text "Z+" at 16.2,40.5 h4
  text "Y+" at 90.2,40.4 h4
  text "SD" at 106.7,32.1 h3 r90
  text "Card" at 109.2,29.4 h3 r90
  text "Spindle" at 87,28.6 h3
  text "X-" at 78.4,28.3 h4
  text "X+" at 101.9,28.3 h4
  text "OK" at 90.1,19.7 h3
  text "Step" at 101.2,16.8 h3
  text "A-" at 3.7,7.1 h4
  text "Z-" at 16.3,7.1 h4
  text "Exit" at 101.04,7.1 h3
  text "Y-" at 90.3,7 h4
  text "TF Card" at 38.7,4.3 h3
  text "USB" at 23.9,2.2 h3
Bottom Overlay:
  lines w0.2: 7.3,3.17 7.3,4.8 17.8,4.8 17.8,3.27
  text "GND" at 9.8,3.6 h0.7
  text "3V3" at 12.5,3.6 h0.7
  text "CK" at 14.5,3.6 h0.7
  text "DO" at 17.2,3.6 h0.7
  text "LY-TJP-A-11050-V2.0" at 101.1,2 h2
Mechanical 15:
  circle w0.127: c3,47 r3.5
  circle w0.127: c3,3 r3.5
  circle w0.127: c107,47 r3.5
  circle w0.127: c107,3 r3.5

## Text inside footprints (layer, text, board x,y; h text height)
P3: Bottom Overlay "CD" at 80.921,18.144 h0.8 r270; Bottom Overlay "WP" at 80.821,33.444 h0.8 r270